# EAGLE board SLock_Main_Device (EAGLE 9.5.2)

Size 73 x 73 mm. Coordinates in mm from the lower left corner, seen from the top.
Outline: 0,71 0,2 arc90 2,0 71,0 arc90 73,2 73,71 arc90 71,73 2,73 arc90 0,71
Outline: circle at 3,3 radius 1.5
Outline: circle at 70,3 radius 1.5
Outline: circle at 70,70 radius 1.5
Outline: circle at 35,60 radius 1.5
Copper layers (1*16): Top 0.035mm / dielectric 1.5mm / Bottom 0.035mm
Design rules "default": minimum track width 6mil, minimum drill 0.35mm, track to track 6mil, track to pad 6mil, pad to pad 6mil, via to via 6mil, smd to smd 6mil, copper to edge 40mil, drill to drill 6mil, minimum pad ring 10mil, minimum via ring 8mil, stop-mask expansion 4mil, vias tented up to drill 0mil, thermal gap 10mil

## Footprints (pad centres in the part's own frame; a part is rotated, then mirrored left to right if it is on the bottom)
SPC4077 = drill 0.8 pad 2.184 long: 1 -3,0; 2 0,-4.8 | drill 1 pad 2.184 long: 3 3,0
ARDUINO_NANO = drill 1.143 square: 1 -20.32,-7.62 | drill 1.143: 2 -17.78,-7.62; 3 -15.24,-7.62; 4 -12.7,-7.62; 5 -10.16,-7.62; 6 -7.62,-7.62; 7 -5.08,-7.62; 8 -2.54,-7.62; 9 0,-7.62; 10 2.54,-7.62; 11 5.08,-7.62; 12 7.62,-7.62; 13 10.16,-7.62; 14 12.7,-7.62; 15 15.24,-7.62; 16 15.24,7.62; 17 12.7,7.62; 18 10.16,7.62; 19 7.62,7.62; 20 5.08,7.62; 21 2.54,7.62; 22 0,7.62; 23 -2.54,7.62; 24 -5.08,7.62; 25 -7.62,7.62; 26 -10.16,7.62; 27 -12.7,7.62; 28 -15.24,7.62; 29 -17.78,7.62; 30 -20.32,7.62
C050-024X044 = drill 0.813 octagon: 1 -2.54,0; 2 2.54,0
SZH-ENBQ-003 = drill 1.143: CLK -1.27,5.08; CS -1.27,-2.54; GND 1.27,-5.08; NT 1.27,5.08; RST 1.27,-2.54; SCK 1.27,0; SI -1.27,0; SO 1.27,2.54; VCC -1.27,-5.08; WOL -1.27,2.54
LED3MM = drill 0.813 octagon: A -1.27,0; K 1.27,0
5267-3 = drill 0.8 long: P$1 0,0; P$2 2.5,0; P$3 5,0
0204/7 = drill 0.813 octagon: 1 -3.81,0; 2 3.81,0
SKPDAMD010 = drill 1: P$1 -2.5,0; P$2 2.5,0
RASPBERRYPI_BASTELSTUBE_V13_RASPI_BOARD_B+_FULL = drill 1 pad 1.778 square: 1 8.37,25.23 | drill 1 pad 1.778: 2 8.37,27.77; 3 10.91,25.23; 4 10.91,27.77; 5 13.45,25.23; 6 13.45,27.77; 7 15.99,25.23; 8 15.99,27.77; 9 18.53,25.23; 10 18.53,27.77; 11 21.07,25.23; 12 21.07,27.77; 13 23.61,25.23; 14 23.61,27.77; 15 26.15,25.23; 16 26.15,27.77; 17 28.69,25.23; 18 28.69,27.77; 19 31.23,25.23; 20 31.23,27.77; 21 33.77,25.23; 22 33.77,27.77; 23 36.31,25.23; 24 36.31,27.77; 25 38.85,25.23; 26 38.85,27.77; 27 41.39,25.23; 28 41.39,27.77; 29 43.93,25.23; 30 43.93,27.77; 31 46.47,25.23; 32 46.47,27.77; 33 49.01,25.23; 34 49.01,27.77; 35 51.55,25.23; 36 51.55,27.77; 37 54.09,25.23; 38 54.09,27.77; 39 56.63,25.23; 40 56.63,27.77 | hole 2.75: 3.5,3.5; 3.5,26.5; 61.5,3.5; 61.5,26.5
YUL262RXT_HOLE = drill 1: 1 7.62,-15.24; 2 7.62,-12.7; 3 7.62,-10.16; 4 7.62,-7.62; 5 7.62,-5.08; 6 7.62,-2.54; 7 7.62,0; 8 7.62,2.54; 9 7.62,5.08; 10 7.62,7.62; 11 7.62,10.16; 12 7.62,12.7; 14 -7.62,10.16; 15 -7.62,7.62; 16 -7.62,5.08; 17 -7.62,2.54; 18 -7.62,0; 19 -7.62,-2.54; 20 -7.62,-5.08; 21 -7.62,-7.62; 22 -7.62,-10.16; 23 -7.62,-12.7; 24 -7.62,-15.24 | drill 1 square: 13 -7.62,12.7

## Placement (x,y rotation side)
5V_DC_JACK  JACK1  [SPC4077]  12.7,9.53 90 top
ARDUINO_NANO1  ARDUINO1  [ARDUINO_NANO]  56.92,31.48 90 top
C1  100nF  [C050-024X044]  15.28,29.21 270 top
C2  100nF  [C050-024X044]  15.28,19.05 270 top
C3  100nF  [C050-024X044]  65,55.88 270 top
LAN  SZH-ENBQ-003  [SZH-ENBQ-003]  29.25,46.99 270 top
LED1  Green  [LED3MM]  23.21,58.92 0 top
LED2  Red  [LED3MM]  23.21,53.84 0 top
LED3  Green  [LED3MM]  23.21,64 0 top
LED4  Red  [LED3MM]  23.21,69.08 0 top
NEO_PIXEL_CON  MOLEX_5267-3  [5267-3]  51.88,66.04 0 top
R1  330Ω  [0204/7]  29.56,61.46 270 top
SW1  SKPDAMD010  [SKPDAMD010]  8.93,29.21 270 top
SW2  SKPDAMD010  [SKPDAMD010]  8.93,19.05 270 top
SW3  SKPDAMD010  [SKPDAMD010]  55.88,55.88 270 top
U$2  RPI-ZERO  [RASPBERRYPI_BASTELSTUBE_V13_RASPI_BOARD_B+_FULL]  69.12,3.81 90 top
YUL262RTX  YUL262RTX  [YUL262RXT_HOLE]  10.2,53.34 0 top

## Library data of the parts
5V_DC_JACK = con-jack; OC_FARNELL: unknown; OC_NEWARK: unknown
ARDUINO_NANO1 = ArduinoNanoV30
C1-C3 = rcl; SPICEPREFIX: C
LAN YUL262RTX = SLock
LED1-LED4 = led
NEO_PIXEL_CON = con-molex-spox
R1 = rcl; SPICEPREFIX: R
SW1-SW3 = switches; MOUSER: 688-SKPDAM
U$2 = RPI-Zero

## Nets
+3V3: LAN.VCC U$2.1
+5V: 5V_DC_JACK.3 ARDUINO_NANO1.12 NEO_PIXEL_CON.P$2 U$2.2 YUL262RTX.24
ARD_RST: ARDUINO_NANO1.18 C3.1 SW3.P$1
CLK: LAN.SCK U$2.23
CS: LAN.CS U$2.24
GND: 5V_DC_JACK.1 ARDUINO_NANO1.14 ARDUINO_NANO1.19 C1.2 C2.2 C3.2 LAN.GND LED1.K LED2.K LED3.K LED4.K NEO_PIXEL_CON.P$3 SW1.P$2 SW2.P$2 SW3.P$2 U$2.39 YUL262RTX.11
GND_2: YUL262RTX.1
LAN_INT: LAN.NT U$2.22
MISO: LAN.SO U$2.21
MOSI: LAN.SI U$2.19
NEO_DI: ARDUINO_NANO1.24 NEO_PIXEL_CON.P$1
RXD: R1.2 YUL262RTX.15
RXD_INPUT: R1.1 U$2.10
SCL: ARDUINO_NANO1.9 U$2.5
SDA: ARDUINO_NANO1.8 U$2.3
TXD: U$2.8 YUL262RTX.16
VCC_1: YUL262RTX.23
VIN: ARDUINO_NANO1.15
YUL262RTX_LED_GRN: LED3.A YUL262RTX.8
YUL262RTX_LED_RED: LED4.A YUL262RTX.10
YUL262RTX_OPTION: U$2.12 YUL262RTX.19
YUL262RTX_OUT1: LED1.A YUL262RTX.6
YUL262RTX_OUT2: LED2.A YUL262RTX.7
YUL262RTX_SW1: C1.1 SW1.P$1 YUL262RTX.21
YUL262RTX_SW2: C2.1 SW2.P$1 YUL262RTX.22

## Tracks (layer width: path | path; a pad name or v marks a point on that pad's centre or on a via)
+3V3  (1 unrouted)
+5V  (4 unrouted)
ARD_RST  (2 unrouted)
CLK  (1 unrouted)
CS  (1 unrouted)
GND  (16 unrouted)
LAN_INT  (1 unrouted)
MISO  (1 unrouted)
MOSI  (1 unrouted)
NEO_DI  (1 unrouted)
RXD  (1 unrouted)
RXD_INPUT  (1 unrouted)
SCL  (1 unrouted)
SDA  (1 unrouted)
TXD  (1 unrouted)
YUL262RTX_LED_GRN  (1 unrouted)
YUL262RTX_LED_RED  (1 unrouted)
YUL262RTX_OPTION  (1 unrouted)
YUL262RTX_OUT1  (1 unrouted)
YUL262RTX_OUT2  (1 unrouted)
YUL262RTX_SW1  (2 unrouted)
YUL262RTX_SW2  (2 unrouted)